# Altium PCB PCB1.PcbDoc (part 4 of 4)
Units mm, origin at the board's own origin, x right, y up, seen from the top; angles counter-clockwise.
Board outline 200 x 55 mm, 4 copper layers (Top Layer, Power Layer, GND Layer, Bottom Layer), stack 1.714 mm thick; 402 components, 269 nets, 1338 pads, 752 vias.
Unrouted connection lines stored in the file: 36.
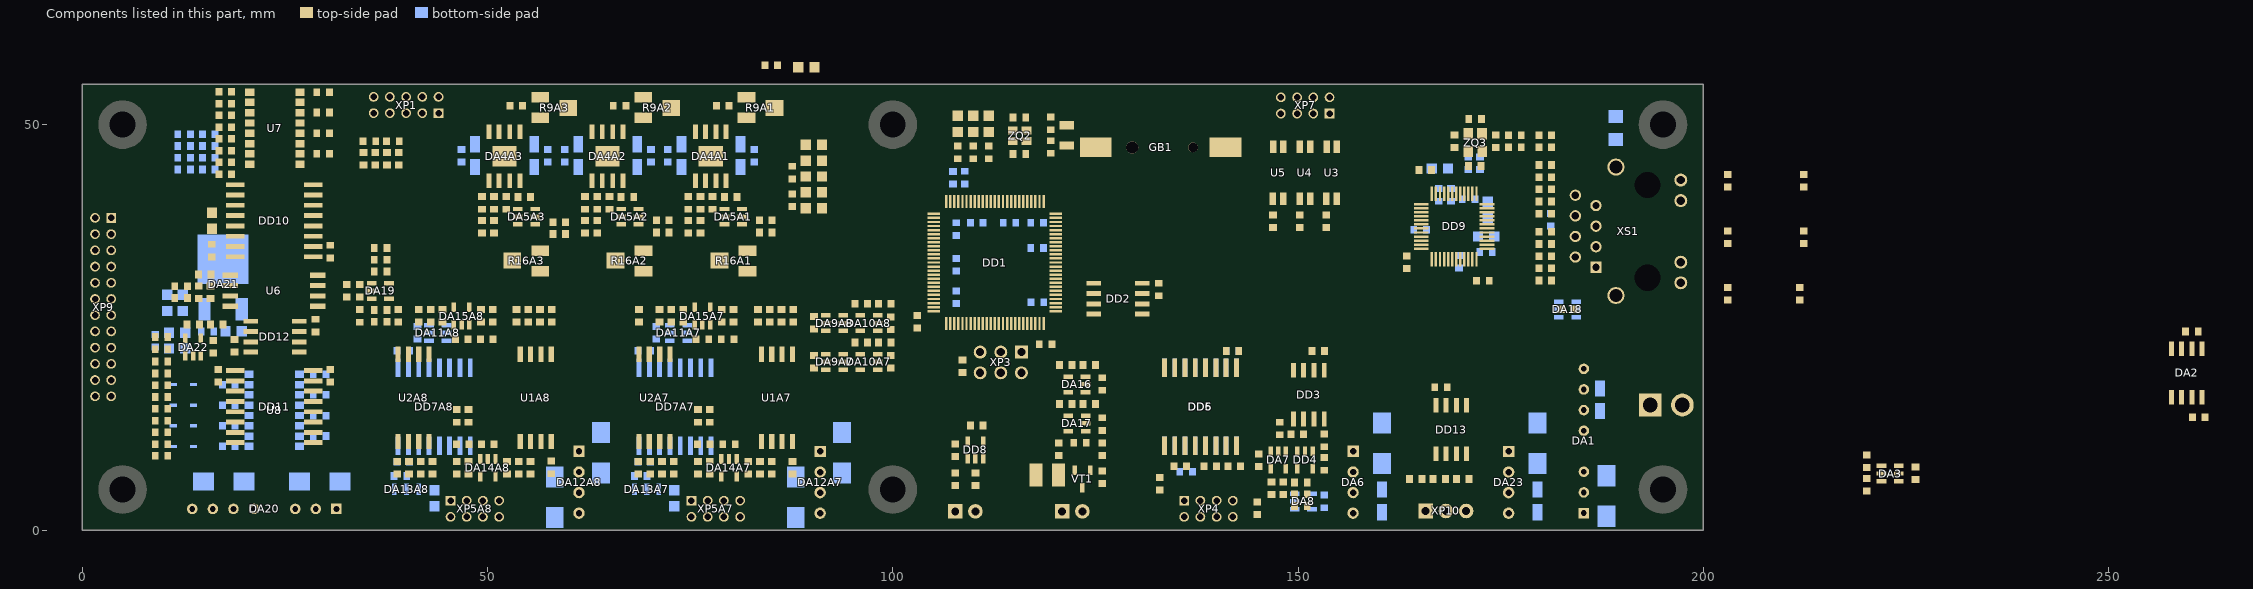
[diagram p6: the components of this part, seen from the top]

## Polygon pours and split planes (outlines as drawn) (continued)
GND_DRVA7 on GND Layer "GND_DRVA7_L03_P000" (solid, remove dead copper, pour order 0): 66.75,14.25 66.75,0 89.25,0 89.25,14.25
GND_DRVA8 on GND Layer "GND_DRVA8_L03_P002" (solid, remove dead copper, pour order 2): 38.5,14.25 36.322,12.072 36.322,0 59.5,0 59.5,14.25
GND_HW on GND Layer "GND_HW_L03_P016" (solid, remove dead copper, pour order 16): 9,0 9,6.5 6.5,9 0,9 0,46 6,46 9,49 9,55 22,55 22,7.55 17.55,3.1 17.55,0
AGND on GND Layer "AGND_L03_P004" (solid, remove dead copper, pour order 4): 34,55 34,28.5 82.25,28.5 88.375,34.625 88.375,55

## Keep-outs
Top Layer:
  lines w0.2: 155.861,26.65 156.2,26.311 159.305,26.311 159.656,26.662 159.656,27.951 159.294,28.312 156.211,28.312 155.861,27.962 155.861,26.65 ; 155.871,18.389 156.21,18.05 159.315,18.05 159.674,18.409 159.674,19.681 159.304,20.051 156.221,20.051 155.871,19.701 155.871,18.389
GND Layer:
  lines w0.2: 154.8,42.775 154.8,27.711 156.23,26.281 159.274,26.281 159.656,26.662 159.656,27.944 157.1,30.5 157.1,42.915 ; 155.871,17.874 155.871,19.701 156.221,20.051 159.304,20.051 159.674,19.681 159.674,17.874
Bottom Layer:
  lines w0.2: 155.871,17.874 155.871,27.973 156.211,28.312 159.287,28.312 159.675,27.925 159.675,17.874

## Other copper
Top Layer:
  pour cut-out: 184.725,21 184.112,20.387 184.112,19.363 184.682,18.793 185.768,18.793 186.35,19.375 186.35,20.375 185.725,21
  pour cut-out: 13.075,3.7 12.462,3.087 12.462,2.063 13.075,1.45 14.075,1.45 14.7,2.075 14.7,3.075 14.075,3.7
GND Layer:
  pour cut-out: 98.75,11.125 98.75,13.5 128.75,13.5 128.75,11.125
  pour cut-out: 184.725,21 184.1,20.375 184.1,19.375 184.725,18.75 185.725,18.75 186.35,19.375 186.35,20.375 185.725,21
  pour cut-out: 13.075,3.7 12.45,3.075 12.45,2.075 13.075,1.45 14.075,1.45 14.7,2.075 14.7,3.075 14.075,3.7
Bottom Layer:
  pour cut-out: 13.075,3.7 12.45,3.075 12.45,2.075 13.075,1.45 14.075,1.45 14.7,2.075 14.7,3.075 14.075,3.7

## Silkscreen, mask and mechanical layers (free items; w line width, h text height)
Top Overlay:
  drawing of 50 lines, arcs and shapes, not listed
  text "SCALE" at 56.474,47.439 h1.3
  text "SCALE" at 69.337,47.439 h1.3
  text "SCALE" at 82.211,47.439 h1.3
  text "OVERPOW" at 52.756,28.641 h1.3
  text "OVERPOW" at 65.481,28.641 h1.3
  text "OVERPOW" at 78.306,28.616 h1.3
  text "Low-profile laser / Control board / Rev.3" at 136.065,24.521 h3
Bottom Overlay:
  lines w0.2: 9.688,25.337 9.85,25.175 ; 9.85,25.175 9.875,25.175 9.85,25.175
Top Assy:
  circle w0.2: c100,50 r1.6
  circle w0.2: c100,5 r1.6
  circle w0.2: c5,50 r1.6
  circle w0.2: c195,50 r1.6
  circle w0.2: c195,5 r1.6
  circle w0.2: c5,5 r1.6
Bottom Assy:
  circle w0.2: c100,50 r1.6
  circle w0.2: c100,5 r1.6
  circle w0.2: c5,50 r1.6
  circle w0.2: c195,50 r1.6
  circle w0.2: c195,5 r1.6
  circle w0.2: c5,5 r1.6
Board Outline:
  the board outline again, w0.2